# EAGLE board csc347 lab 0 (EAGLE 7.6.0)

Size 56.82 x 53.33 mm. Coordinates in mm from the lower left corner, seen from the top.
Outline: 0,0 56.82,0 56.82,53.33 0,53.33 0,0
Copper layers (1*16): Top 0.035mm / dielectric 1.5mm / Bottom 0.035mm
Design rules "default": minimum track width 10mil, minimum drill 24mil, track to track 8mil, track to pad 8mil, pad to pad 8mil, via to via 8mil, smd to smd 8mil, copper to edge 40mil, drill to drill 8mil, minimum pad ring 10mil, minimum via ring 8mil, stop-mask expansion 4mil, vias tented up to drill 0mil, thermal gap 10mil

## Footprints (pad centres in the part's own frame; a part is rotated, then mirrored left to right if it is on the bottom)
LED5MM = drill 0.813 octagon: A -1.27,0; K 1.27,0
2P-2.54-65/35MIL = drill 0.889 pad 1.651 square: 1 0,1.27 | drill 0.889 pad 1.651: 2 0,-1.27
0207/10 = drill 0.813 octagon: 1 -5.08,0; 2 5.08,0
DIP06YL = drill 0.813 long: 1 -6.35,-3.81; 2 -3.81,-3.81; 3 -1.27,-3.81; 4 1.27,-3.81; 5 3.81,-3.81; 6 6.35,-3.81; 7 6.35,3.81; 8 3.81,3.81; 9 1.27,3.81; 10 -1.27,3.81; 11 -3.81,3.81; 12 -6.35,3.81
DIL14 = drill 0.813 long: 1 -7.62,-3.81; 2 -5.08,-3.81; 3 -2.54,-3.81; 4 0,-3.81; 5 2.54,-3.81; 6 5.08,-3.81; 7 7.62,-3.81; 8 7.62,3.81; 9 5.08,3.81; 10 2.54,3.81; 11 0,3.81; 12 -2.54,3.81; 13 -5.08,3.81; 14 -7.62,3.81

## Placement (x,y rotation side)
D2  [LED5MM]  5,22.78 0 top
D3  [LED5MM]  5,35.48 0 top
D4  [LED5MM]  5,48.18 0 top
D5  [LED5MM]  5,60.88 0 top  (outside the outline)
P1  5V  [2P-2.54-65/35MIL]  5,10.08 0 top
R1  100k‎Ω  [0207/10]  5,73.58 0 top  (outside the outline)
R2  100k‎Ω  [0207/10]  5,86.28 0 top  (outside the outline)
R3  100k‎Ω  [0207/10]  5,98.98 0 top  (outside the outline)
R4  100k‎Ω  [0207/10]  5,111.68 0 top  (outside the outline)
R5  100k‎Ω  [0207/10]  5,137.08 0 top  (outside the outline)
R6  100k‎Ω  [0207/10]  5,149.78 0 top  (outside the outline)
R7  100k‎Ω  [0207/10]  5,162.48 0 top  (outside the outline)
R8  100k‎Ω  [0207/10]  5,175.18 0 top  (outside the outline)
R9  100k‎Ω  [0207/10]  5,187.88 0 top  (outside the outline)
R10  100k‎Ω  [0207/10]  5,200.58 0 top  (outside the outline)
SW1  [DIP06YL]  5,124.38 0 top  (outside the outline)
U1  [DIL14]  5,213.28 0 top  (outside the outline)
U2  [DIL14]  5,225.98 0 top  (outside the outline)
U3  [DIL14]  5,238.68 0 top  (outside the outline)

## Library data of the parts
D2-D5 P1 R1-R10 SW1 U1-U3 = AUTODESK_CIRCUITS_BREADBOARD

## Nets
N$1: P1.2 SW1.7 SW1.8 SW1.9 SW1.10 SW1.11 SW1.12
N$2: D2.A R1.2
N$3: D2.K D3.K D4.K D5.K P1.1 R5.1 R6.1 R7.1 R8.1 R9.1 R10.1
N$4: D3.A R2.2
N$5: D4.A R3.2
N$6: D5.A R4.2
N$7: R2.1 R7.2 SW1.4
N$8: R1.1 R6.2 SW1.5
N$9: R3.1 R9.2 SW1.2
N$10: R4.1 R10.2 SW1.1
N$11: R5.2 SW1.6
N$12: R8.2 SW1.3
N$13: U1.1
N$14: U1.2
N$15: U1.3
N$16: U1.5
N$17: U1.9
N$18: U1.14
N$19: U1.11
N$20: U1.12
N$21: U1.4
N$22: U1.6
N$23: U1.7
N$24: U1.8
N$25: U1.10
N$26: U1.13
N$27: U2.1
N$28: U2.3
N$29: U2.5
N$30: U2.11
N$31: U2.12
N$32: U2.4
N$33: U2.13
N$34: U2.2
N$35: U2.6
N$36: U2.8
N$37: U2.14
N$38: U2.9
N$39: U2.7
N$40: U2.10
N$41: U3.13
N$42: U3.8
N$43: U3.12
N$44: U3.2
N$45: U3.5
N$46: U3.1
N$47: U3.3
N$48: U3.6
N$49: U3.9
N$50: U3.4
N$51: U3.7
N$52: U3.10
N$53: U3.11
N$54: U3.14

## Tracks (layer width: path | path; a pad name or v marks a point on that pad's centre or on a via)
N$1  (6 unrouted)
N$2  (1 unrouted)
N$3  (10 unrouted)
N$4  (1 unrouted)
N$5  (1 unrouted)
N$6  (1 unrouted)
N$7  (2 unrouted)
N$8  (2 unrouted)
N$9  (2 unrouted)
N$10  (2 unrouted)
N$11  (1 unrouted)
N$12  (1 unrouted)